# Altium PCB DragonFly.PcbDoc (part 2 of 2)
Units mil, origin at the board's own origin, x right, y up, seen from the top; angles counter-clockwise.
Board outline 3771.33 x 3716.36 mil, 4 copper layers (Top Layer, Signal Layer 1, Signal Layer 2, Bottom Layer), stack 47.519 mil thick; 111 components, 70 nets, 378 pads, 144 vias.
Unrouted connection lines stored in the file: 86.
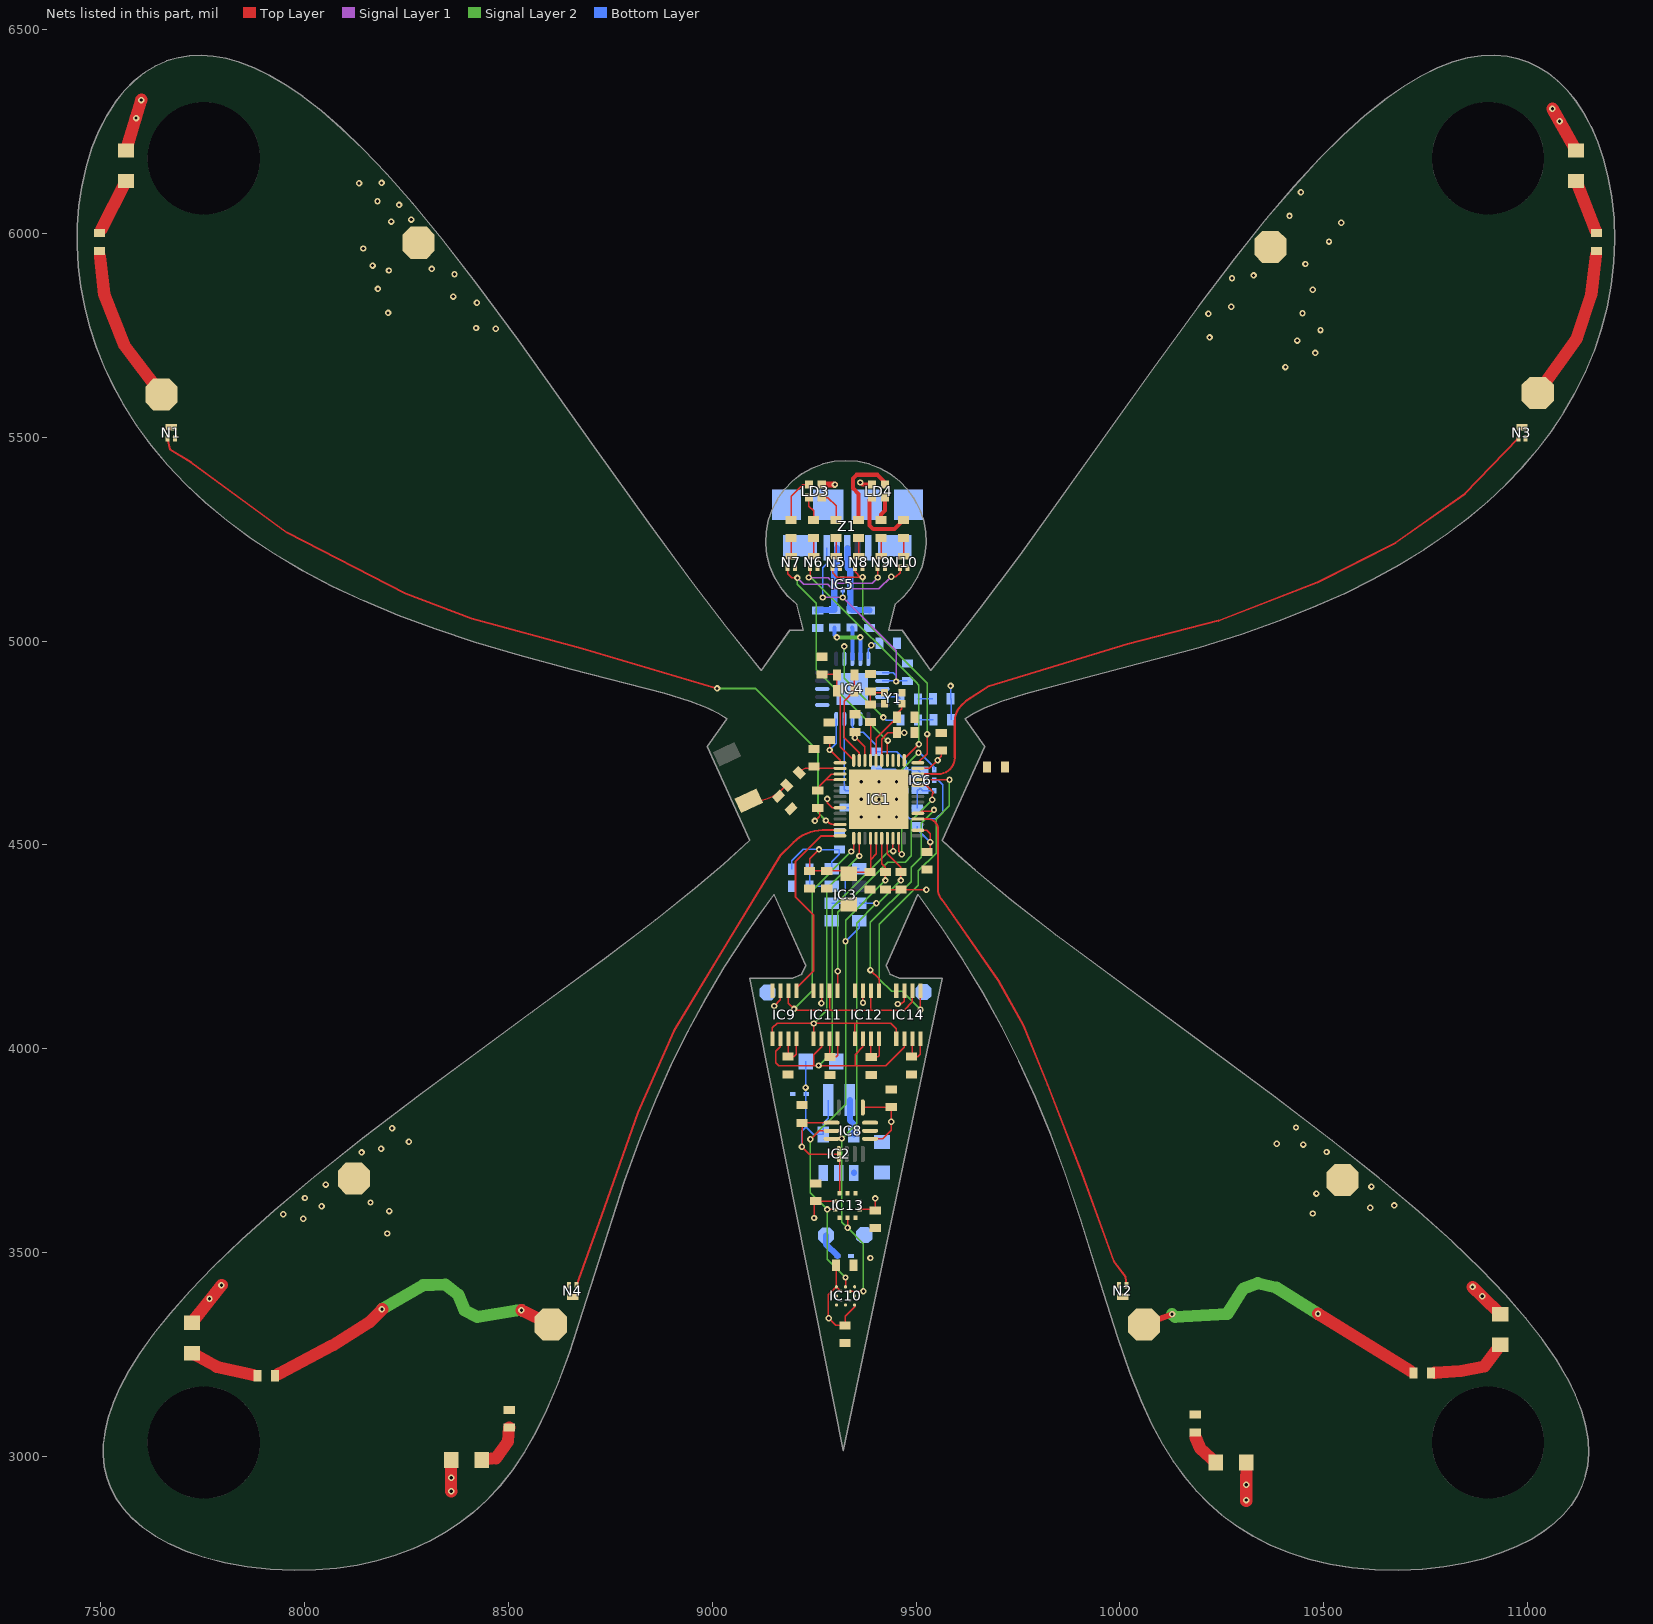
[diagram p4: the nets of this part, all layers, seen from the top]

## Footprints (in the part's own frame and the unit in brackets; to place one, negate y for a bottom-side part, rotate by r counter-clockwise, add the part's x,y. Pads: shape width x height; smd on the part's side, far side on the other; paste and mask are expansions set on the pad) (continued)
"ESP32 QFN35P500X500X90_HS-49N" [mm] "QFN, 48-Leads, Body 5,00x5,00mm, Pitch 0,35mm, Thermal Pad 3,70x3,70mm, IPC Medium Density"
  oval 0.8x0.2 smd: 1(-2.425,2.275) 2(-2.425,1.925) 3(-2.425,1.575) 4(-2.425,1.225) 5(-2.425,0.875) 6(-2.425,0.525) 7(-2.425,0.175) 8(-2.425,-0.175) 9(-2.425,-0.525) 10(-2.425,-0.875) 11(-2.425,-1.225) 12(-2.425,-1.575) 13(-2.425,-1.925) 14(-2.425,-2.275) 25(2.425,-2.275) 26(2.425,-1.925) 27(2.425,-1.575) 28(2.425,-1.225) 29(2.425,-0.875) 30(2.425,-0.525) 31(2.425,-0.175) 32(2.425,0.175) 33(2.425,0.525) 34(2.425,0.875) 35(2.425,1.225) 36(2.425,1.575) 37(2.425,1.925) 38(2.425,2.275)
  oval 0.2x0.8 smd: 15(-1.575,-2.425) 16(-1.225,-2.425) 17(-0.875,-2.425) 18(-0.525,-2.425) 19(-0.175,-2.425) 20(0.175,-2.425) 21(0.525,-2.425) 22(0.875,-2.425) 23(1.225,-2.425) 24(1.575,-2.425) 39(1.575,2.425) 40(1.225,2.425) 41(0.875,2.425) 42(0.525,2.425) 43(0.175,2.425) 44(-0.175,2.425) 45(-0.525,2.425) 46(-0.875,2.425) 47(-1.225,2.425) 48(-1.575,2.425)
  rect 3.7x3.7 smd: 49(0,0)
  silkscreen extent -3.1,2.85 -2.85,3.1, body extent -2.53,-2.53 2.53,2.53, height 0.9
MDMK2020 [mm] "Inductor"
  rect 0.65x2 smd: 1(-0.675,0) 2(0.675,0)
  silkscreen extent -1.09,-1.09 1.09,1.09, body extent -1,-1 1,1, height 1.2
QFN20-127P600-8N [mm]
  oval 0.9x0.25 smd: 1(-1.875,1) 2(-1.875,0.5) 3(-1.875,0) 4(-1.875,-0.5) 5(-1.875,-1) 11(1.875,-1) 12(1.875,-0.5) 13(1.875,0) 14(1.875,0.5) 15(1.875,1)
  oval 0.25x0.9 smd: 6(-1,-1.875) 7(-0.5,-1.875) 8(0,-1.875) 9(0.5,-1.875) 10(1,-1.875) 16(1,1.875) 17(0.5,1.875) 18(0,1.875) 19(-0.5,1.875) 20(-1,1.875)
  rect 1.98x1.98 smd paste-0.5: 21(0,0)
  silkscreen extent -2.92,-2.15 2.15,2.15, body extent -2,-2.01 2.01,2, height 0.8
Signal_point_1mm [mm]
  oct 1x1 smd paste-1: 0(0,0)
Signal_point_2mm [mm]
  oct 2x2 smd paste-1: 0(0,0)
"SOD 923" [mm]
  rect 0.36x0.25 smd mask+0.05: 1(-0.42,0) 2(0.42,0)
  silkscreen extent -0.4,-0.3 0.4,0.3, body extent -0.43,-0.33 0.43,0.33, height 0.39
SOT886 [mm]
  rect 0.325x0.27 smd mask+0.05: 1(-0.337,0.5) 2(-0.337,0) 3(-0.337,-0.5) 4(0.337,-0.5) 5(0.337,-0.025) 6(0.337,0.5)
  silkscreen extent -0.92,-0.85 0.63,0.9, body extent -0.63,-0.85 0.63,0.85, height 0.5
"SOT 23 - 5" [mm]
  rect 0.6x1 smd: 1(0.95,1.15) 2(0,1.15) 3(-0.95,1.15)
  rect 0.7x1 smd: 4(-0.95,-1.25) 5(0.95,-1.25)
  silkscreen extent -1.7,-0.5 1.7,0.4, body extent -1.5,-1.65 1.5,1.55, height 0.92
"USB - microB" [mm]
  rect 0.4x1.6 smd: 1(-1.3,2.675) 2(-0.65,2.675) 3(0,2.675) 4(0.65,2.675) 5(1.3,2.675)
  rect 1.8x1.9 smd: 5(-3.8,0) 5(3.8,0)
  rect 2.1x1.35 smd: 5(-2.95,2.55) 5(2.95,2.55)
  rect 1.9x1.9 smd: 5(-1.2,0) 5(1.2,0)
  silkscreen extent -3.73,-2.64 3.78,1.7, body extent -3.99,-2.69 3.99,2.73, height 2.93
VCNL4040M3OE [mm]
  rect 0.9x0.725 smd mask+0.05: 1(0.85,-1.613) 2(0.85,-0.537) 3(0.85,0.537) 4(0.85,1.613) 5(-0.85,1.613) 6(-0.85,0.537) 7(-0.85,-0.537) 8(-0.85,-1.613)
  silkscreen extent -1.4,-2.5 1.4,2.1, body extent -1.2,-1.9 1.2,1.9, height 3.65
"XTAL 1.6X1.2MM 4-SMD" [mm]
  rect 0.45x0.45 smd: 1(-0.54,0.34) 2(0.54,-0.34) 3(0.54,0.34) 4(-0.54,-0.34)
  body extent -0.8,-0.6 0.8,0.6, height 0.35

## Part data
ANT1: "2.4GHz Chip RF Antenna 2.4GHz"
IC9 IC11 IC12 IC14: library part W25X20CL, DigiKey Part #=W25Q80DVUXIECT-ND
LD1: Color=RX
LD2: Color=TX
LD3 LD4: library part "RGB LED", DigiKey Part #=475-3597-1-ND
LD5 LD6: Color=Red
LD7 LD8 LD9 LD10: Color=Green
Z1: library part "USB - microB", "609-4613-1-ND", DigiKey Part #=609-4613-1-ND
D1: DigiKey Part #=ESD9X5.0ST5GOSCT-ND
IC1: DigiKey Part #=1904-1005-1-ND
IC2: DigiKey Part #=LM3671MF-3.3/NOPBCT-ND
IC3: DigiKey Part #=VCNL4040M3OECT-ND
IC4: DigiKey Part #=768-1128-1-ND
IC5: DigiKey Part #=1727-4161-6-ND
IC6: DigiKey Part #=1727-1075-1-ND
IC8: DigiKey Part #=828-1057-1-ND
IC10: DigiKey Part #=828-1044-1-ND
IC13: DigiKey Part #=828-1079-1-ND
Y1: DigiKey Part #=535-13987-1-ND

## Free pads (board coordinates)
  round 275.59 hole 275.59: 1(7753.32,3034.41) 1(7753.32,6184.02) 1(10902.92,3034.41) 1(10902.92,6184.02)

## Via types
v1: diameter 15.75, hole 7.87, Top Layer to Bottom Layer, tented both sides, 135 vias
v2: diameter 15.75, hole 7.87, Top Layer to Bottom Layer, tented bottom, 9 vias

## Nets (pads, with @x,y where several pads share a name; then routed paths per layer and width w, separated by ;. In a path a pad name is that pad's centre, name@x,y a point inside that pad or via, vN(x,y) a via of type N, cw(c..) or ccw(c..) an arc to the next point about the centre after c; other vN are vias at no path point)
CAP1: C12.2 C13.2 IC1.48 R3.2 | length 263.5
  Top Layer w3.5: C13.2@9269.35,4918.35 9304.35,4918.35 C12.2@9305.69,4917 R3.2@9305.69,4878 9314,4869.69 9314,4740.46 IC1.48@9346.99,4707.47
CAP2: C12.1 IC1.47 R3.1 | length 235.1
  Top Layer w3.5: C12.1@9349,4917 R3.1@9349,4878 9324,4853 9324,4763 9360.77,4726.23 IC1.47@9360.77,4707.47
CHIP_PU: IC1.9 IC6.6 R23.2 | length 134.8
  Top Layer w3.5: v1@9282,4612 9282,4604 9294.67,4591.33 IC1.9@9313.53,4591.33
  Bottom Layer w3.5: R23.2@9503,4589.65 9503,4632.71 IC6.6@9510,4639.71 9516.3,4633.41 IC6.6@9544.45,4633.41
  other v1: 9282,4613
D_N: C26.2 IC5.1 IC5.6 R7.1 Z1.2 | length 197.3
  Bottom Layer w15: C26.2@9259,5075.65 9259.5,5076.15 R7.1@9300.33,5076.15 9299.32,5077.17 IC5.6@9299.32,5125.71 IC5.1@9299.32,5152.29 9299.32,5174.31 9306.17,5181.17 Z1.2@9306.17,5228.69
D_P: C27.2 IC5.3 IC5.4 R8.1 Z1.3 | length 200.7
  Bottom Layer w15: Z1.3@9331.76,5228.69 9331.76,5180.24 9338.68,5173.31 IC5.3@9338.68,5152.29 IC5.4@9338.68,5125.71 9338.68,5115.01 9338.87,5114.82 9338.87,5099.18 9338.68,5098.99 9338.68,5080.14 R8.1@9342.67,5076.15 9385.5,5076.15 C27.2@9386,5075.65
DTR: IC4.18 IC6.3 R24.1 | length 253.2
  Bottom Layer w3.5: IC4.18@9343.63,4809 9343.63,4789.37 9357,4776 9371,4776 9403,4744 R24.1@9403,4728.65 9452.35,4728.65 9475.55,4705.45 IC6.3@9475.55,4684.59 9503.7,4684.59 IC6.3@9510,4678.29
GND: C1.1 C2.1 C3.1 C4.1 C5.1 C6.1 C7.1 C8.1 C9.1 C10.1 C11.1 C13.1 C14.1 C15.1 C17.1 C18.1 C19.1 C20.1 C24.1 C25.1 C26.1 C27.1 C28.1 C29.1 C30.1 C31.1 C32.1 C33.1 C34.1 C35.1 C36.1 C37.1 D1.1 D2.1 IC1.49 IC2.2 IC3.1 IC4.3 IC4.13 IC4.21 IC5.2 IC8.6 IC8.7 IC9.4 IC10.A5 IC10.C1 IC10.C5 IC10.E1 IC10.E3 IC11.4 IC12.4 IC13.3 IC13.5 IC13.8 IC13.9 IC14.4 N1.1 N2.1 N3.1 N4.1 N5.1 N6.1 N7.1 N8.1 N9.1 N10.1 R17.1 R18.1 SP1.0@9136,4138 SP2.0@9518,4139 SP16.0 Y1.3 Y1.4 Z1.5 | length 61.8
  Bottom Layer w15: SP16.0@9279,3542 9279,3520.46 D2.1@9307.46,3492
  other v2: 9365.69,4568.69 9409,4568.69 9452.31,4568.69 9365.69,4612 9409,4612 9452.31,4612 9365.69,4655.31 9409,4655.31 9452.31,4655.31
GPIO0: IC1.23 IC6.4 | length 368.9
  Top Layer w3.5: IC1.23@9457.23,4516.53 9457.23,4484.77 v1(9465,4477)
  Signal Layer 2 w3.5: v1(9465,4477) 9465,4562.83 9465.43,4563.26 9465.43,4574.13 9465,4574.56 9465,4606.13 9465.43,4606.56 9465.43,4617.44 9465,4617.87 9465,4649.44 9465.43,4649.87 9465.43,4660.74 9465,4661.17 9465,4685 v1(9506,4726)
  Bottom Layer w3.5: v1(9506,4726) 9509,4726 9544.45,4690.55 IC6.4@9544.45,4684.59
LD1_B: IC1.42 N7.2 N10.2 | length 879
  Top Layer w3.5: N7.2@9185.24,5180.22 9185.24,5165 9195.24,5155 v1(9209,5155) ; IC1.42@9429.67,4707.47 9429.67,4754.67 v1(9431,4756) ; v1(9439,5158) 9450.83,5158 9460.83,5168 N10.2@9460.83,5180.22
  Signal Layer 1 w3.5: v1(9209,5155) 9224.88,5139.12 9283.88,5139.12 9295,5128 9409,5128 v1(9439,5158)
  Signal Layer 2 w3.5: v1(9209,5155) 9209,5139 9255,5093 9255,4930 9431,4754 v1(9431,4756)
LD1_G: IC1.39 N6.2 N9.2 | length 812
  Top Layer w3.5: v1(9237,5156) 9239.72,5156 9240.36,5155.36 N6.2@9240.36,5180.22 ; N9.2@9405.71,5180.22 9405.71,5156.29 v1(9406,5156) ; IC1.39@9471.01,4707.47 9471.01,4711.01 v1(9507,4747)
  Signal Layer 1 w3.5: v1(9237,5156) 9285,5156 9299,5142 9392,5142 v1(9406,5156)
  Signal Layer 2 w3.5: v1(9237,5156) 9242.56,5156 9283.56,5115 9500,4898.56 9507,4891.56 v1(9507,4747)
LD1_R: IC1.38 N5.2 N8.2 | length 649.3
  Top Layer w3.5: N5.2@9295.48,5180.22 9295.48,5167.52 9306,5157 v1@9363.44,5157 ; N8.2@9350.59,5180.22 9350.59,5169.85 v1@9363.44,5157 ; v1(9369,5157) v1@9363.44,5157 ; IC1.38@9504.47,4701.57 9527,4724.09 v1(9527,4772)
  Signal Layer 2 w3.5: v1(9369,5157) 9369,5055 9527,4897 v1(9527,4772)
LNA_IN: C14.2 IC1.2 L2.1 | length 95.4
  Top Layer w3.5: L2.1@9219.31,4683.31 cw(c9230.12,4672.51) 9230.12,4687.79 IC1.2@9313.53,4687.79
MISO: IC1.15 IC9.2 IC11.2 IC12.2 IC14.2 | length 954.8
  Top Layer w3.5: IC9.2@9186.84,4142.86 9186.84,4112.16 v1(9201,4098) 9201,4095 9288,4095 ; IC11.2@9288.18,4142.86 9288.18,4095.18 9288,4095 ; v1(9341,4484) 9346.99,4489.99 IC1.15@9346.99,4516.53 ; IC12.2@9389.51,4142.86 9389.51,4095.49 9390,4095 ; IC14.2@9490.84,4142.86 9490.84,4114.84 9471,4095 9390,4095 ; 9288,4095 9390,4095
  Signal Layer 2 w3.5: v1(9201,4098) 9245,4142 9245,4388 v1(9341,4484)
MOSI: IC1.16 IC9.5 IC11.5 IC12.5 IC14.5 | length 942
  Top Layer w3.5: IC9.5@9147.47,4025.14 9147.47,4051.47 9159,4063 v1@9249,4063 ; IC11.5@9248.81,4025.14 9248.81,4062.81 v1@9249,4063 ; IC12.5@9350.14,4025.14 9350.14,4062.86 9350,4063 ; IC1.16@9360.77,4516.53 9360.77,4473.23 v1(9361,4473) ; IC14.5@9451.47,4025.14 9451.47,4049.53 9438,4063 9350,4063 ; v1@9249,4063 9350,4063
  Signal Layer 2 w3.5: v1(9249,4062) 9281.12,4094.12 9281.12,4125 9281,4125.12 9281,4393 v1(9361,4473)
MOTOR1: IC1.12 N1.2 | length 2033.3
  Top Layer w5: N1.2@7664.14,5497.22 7670,5470 7721,5439 7957,5266 8248,5117 8410,5055 8681,4982 v1(9012,4884) ; v1(9279,4560) ccw(c9303.16,4584.16) 9286.88,4554.12 ccw(c9303.16,4584.16) 9303.16,4549.99 IC1.12@9313.53,4549.99
  Signal Layer 2 w5: v1(9012,4884) 9106,4884 9259,4731 9259,4580 v1(9279,4560)
MOTOR2: IC1.36 N3.2 | length 1786.6
  Top Layer w5: IC1.36@9504.47,4674.01 9555.01,4674.01 ccw(c9555.01,4714) 9595,4714 9595,4805 cw(c9645.7,4805) 9609.83,4840.83 9622,4853 9679,4890 9679.92,4890.28 10019,4993 10242,5050 10484,5144 10676,5241 10846,5361 N3.2@10977.14,5497.22
MOTOR3: IC1.28 N2.2 | length 1295.7
  Top Layer w5: IC1.28@9504.47,4563.77 9529.23,4563.77 cw(c9529.23,4539.16) 9553.84,4539.16 9553.84,4392.58 ccw(c9597.08,4392.58) 9557.76,4374.59 ccw(c9597.08,4392.58) 9566.51,4362 9702,4167 9764,4057 9823,3911 9907,3694 9985,3479 10014,3441 N2.2@10015.86,3419.78
MOTOR4: IC1.13 N4.2 | length 1339.8
  Top Layer w5: N4.2@8666.86,3419.78 8728,3590 8818,3844 8906,4044 9039,4263 9167.52,4474.52 9199.92,4506.92 cw(c9270.63,4436.21) 9270.63,4536.21 IC1.13@9313.53,4536.21
NetANT1_1: ANT1.1 C15.2 L2.2 | length 113.2
  Top Layer w3.5: ANT1.1@9089.61,4608.26 9102.84,4608.26 ccw(c9102.84,4708.26) 9173.55,4637.55 L2.2@9182.69,4646.69 L2.2@9188.69,4652.69
NetC7_2: C7.2 IC3.3 R5.1 | length 96.5
  Bottom Layer w3.5: R5.1@9239.01,4440.52 C7.2@9239.01,4398.52 9292.71,4398.52 IC3.3@9293.31,4399.11
NetC18_2: C18.2 R6.2 Y1.2 | length 67.7
  Top Layer w3.5: R6.2@9388,4844.65 C18.2@9388,4876.35 9390.96,4873.39 Y1.2@9422.74,4873.39
NetIC1_40: IC1.40 R4.2
NetIC2_5: IC2.5 L3.1 | length 87.9
  Bottom Layer w15: L3.1@9337.57,3874 9337.57,3824.43 9347.4,3814.6 IC2.5@9347.4,3790.21
NetIC3_2: IC3.2 IC3.5 | length 138.9
  Bottom Layer w3.5: IC3.2@9293.31,4356.79 9317.42,4356.79 9326.77,4366.14 9326.77,4429.13 9339.07,4441.44 IC3.5@9360.24,4441.44
NetIC4_7: IC4.7 R10.1 | length 288.5
  Signal Layer 2 w3.5: v1(9324,4987) 9324,4909 v1(9420,4813)
  Bottom Layer w3.5: IC4.7@9323.94,4956.64 9324,4956.69 v1(9324,4987) ; v1(9420,4813) 9426.6,4806.4 R10.1@9461.6,4806.4
NetIC4_8: IC4.8 R8.2 | length 76.8
  Bottom Layer w10: R8.2@9342.67,5032.85 9344,5031.51 IC4.8@9344,4956.64
NetIC4_9: IC4.9 R7.2 | length 135.8
  Signal Layer 2 w10: v1(9306,5009) v1(9363,5009)
  Bottom Layer w10: R7.2@9300.33,5032.85 9300.33,5014.67 v1(9306,5009) ; v1(9363,5009) 9363.68,5008.31 IC4.9@9363.68,4956.64
NetIC4_14: IC4.14 R9.1 | length 46
  Bottom Layer w3.5: IC4.14@9417.45,4863.13 9456.59,4863.13 R9.1@9461.44,4858.28
NetIC6_2: IC6.2 R24.2 | length 83.5
  Bottom Layer w3.5: R24.2@9403,4685.35 9449.2,4685.35 IC6.2@9475.55,4659
NetIC6_5: IC6.5 R25.2 | length 350.2
  Bottom Layer w3.5: R25.2@9326,4591.35 9456.65,4591.35 9484.12,4563.88 9548.88,4563.88 9565,4580 9565,4648 9554,4659 IC6.5@9544.45,4659
NetLD1_2: LD1.2 R9.2 | length 37
  Bottom Layer w3.5: R9.2@9504.75,4858.28 9541.06,4858.28 LD1.2@9541.57,4858.79
NetLD2_2: LD2.2 R10.2 | length 37.9
  Bottom Layer w3.5: R10.2@9504.91,4806.4 9505.41,4806.91 LD2.2@9542.57,4806.91
NetLD3_2: LD3.2 R11.2 | length 79
  Top Layer w3.5: LD3.2@9268.75,5352.25 9283.75,5352.25 9303.83,5332.17 R11.2@9303.83,5296.56
NetLD3_3: LD3.3 R12.2 | length 60.4
  Top Layer w3.5: LD3.3@9237.25,5352.25 9237.25,5330.75 9248.72,5319.28 R12.2@9248.72,5296.56
NetLD3_4: LD3.4 R13.2 | length 114.4
  Top Layer w3.5: R13.2@9193.6,5296.56 9193.6,5355.6 9221.75,5383.75 LD3.4@9237.25,5383.75
NetLD4_2: LD4.2 R14.2 | length 204
  Top Layer w10: R14.2@9358.95,5296.56 9358.95,5361.05 9345,5375 9345,5399 9354,5408 9405,5408 9423.75,5389.25 LD4.2@9423.75,5383.75
NetLD4_3: LD4.3 R15.2 | length 59.7
  Top Layer w10: R15.2@9414.07,5296.56 9414.07,5311.07 9423.75,5320.75 LD4.3@9423.75,5352.25
NetLD4_4: LD4.4 R16.2 | length 166.7
  Top Layer w10: LD4.4@9392.25,5352.25 9386,5346 9386,5284 9395,5275 9447.63,5275 R16.2@9469.19,5296.56
NetLD5_2: LD5.2 R17.2 | length 120.5
  Top Layer w30: LD5.2@8434.4,2992 8470,2996 8499,3037 R17.2@8502,3071.35
NetLD6_2: LD6.2 R18.2 | length 80.3
  Top Layer w30: 10186,3046 10197,3020 LD6.2@10235.6,2985
NetLD7_2: LD7.2 R19.2 | length 134.7
  Top Layer w30: R19.2@7500.99,6008.51 LD7.2@7562,6128.6
NetLD8_2: LD8.2 R20.2 | length 128.3
  Top Layer w30: LD8.2@11119,6128.6 R20.2@11165.7,6009.1
NetLD9_2: LD9.2 R21.2 | length 189.5
  Top Layer w30: R21.2@10772.03,3205.57 10837,3210 10894,3221 LD9.2@10933,3274.6
NetLD10_2: LD10.2 R22.2 | length 161.3
  Top Layer w30: LD10.2@7724,3253.6 7785,3220 7874.48,3200.18
NetN5_3: N5.3 R11.1 | length 45.7
  Top Layer w3.5: R11.1@9303.83,5253.25 9303.83,5208.28 N5.3@9304.34,5207.78
NetN6_3: N6.3 R12.1 | length 45.7
  Top Layer w3.5: R12.1@9248.72,5253.25 9248.72,5208.28 N6.3@9249.22,5207.78
NetN7_3: N7.3 R13.1 | length 45.7
  Top Layer w3.5: R13.1@9193.6,5253.25 9193.6,5208.28 N7.3@9194.1,5207.78
NetN8_3: N8.3 R14.1 | length 45.7
  Top Layer w3.5: R14.1@9358.95,5253.25 9359.46,5252.75 N8.3@9359.46,5207.78
NetN9_3: N9.3 R15.1 | length 45.7
  Top Layer w3.5: R15.1@9414.07,5253.25 9414.07,5208.28 N9.3@9414.58,5207.78
NetN10_3: N10.3 R16.1 | length 45.7
  Top Layer w3.5: R16.1@9469.19,5253.25 9469.69,5252.75 N10.3@9469.69,5207.78
RTS: IC4.19 IC6.1 R25.1 | length 325.3
  Bottom Layer w3.5: IC4.19@9323.94,4809 9323.94,4636.71 R25.1@9326,4634.65 9327.24,4633.41 IC6.1@9475.55,4633.41
SCL: IC1.20 IC3.8 IC8.13 IC10.A3 IC13.2 R2.1 | length 1362
  Top Layer w3.5: v1(9241,3778) 9241,3777 9263,3799 IC8.13@9292.76,3799 ; v1(9282,3606) 9282.16,3606.16 IC13.2@9301.98,3606.16 ; IC10.A3@9327,3416.28 v1(9327,3439) ; IC1.20@9415.89,4516.53 9415.89,4454.11 9425,4445 R2.1@9425,4433.65 v1(9425,4413)
  Signal Layer 2 w3.5: v1(9327,3439) 9282,3484 v1(9282,3606) 9241,3647 v1(9241,3778) 9327,3864 v1(9327,4264) 9327,4315 v1(9425,4413)
  Bottom Layer w3.5: v1(9327,4264) 9360.24,4297.24 IC3.8@9360.24,4314.47
SCLK: IC1.22 IC9.6 IC11.6 IC12.6 IC14.6 | length 1209.7
  Top Layer w3.5: IC9.6@9167.16,4025.14 9167.16,4005.16 9156,3994 9156,3966 9163,3959 9249,3959 ; IC11.6@9268.49,4025.14 9268.49,4004.49 9249,3985 9249,3959 ; IC12.6@9369.82,4025.14 9369.82,4004.82 9351,3986 9351,3959 ; IC1.22@9443.45,4516.53 9443.45,4485.55 v1(9444,4485) ; IC14.6@9471.16,4025.14 9471.16,4004.16 9426,3959 9351,3959 ; 9249,3959 v1(9261,3959) 9351,3959
  Signal Layer 2 w3.5: v1(9261,3959) 9294,3992 9294,4346 9433,4485 v1(9444,4485)
SDA: IC1.21 IC3.7 IC8.14 IC10.B4 IC13.4 R1.1 | length 1335.4
  Top Layer w3.5: IC8.14@9292.76,3779.32 9317.32,3779.32 v1(9318,3780) ; v1(9332,3561) IC13.4@9332,3585.98 ; IC10.B4@9338.14,3405.14 9370.86,3405.14 v1(9371,3405.28) ; IC1.21@9429.67,4516.53 9429.67,4478.33 9463,4445 R1.1@9463,4433.65 v1(9463,4413)
  Signal Layer 2 w3.5: v1(9371,3405.28) 9371,3522 v1(9332,3561) 9318,3575 v1(9318,3780) 9354,3816 9354,4308 v1(9402.79,4356.79) 9406.79,4356.79 v1(9463,4413)
  Bottom Layer w3.5: IC3.7@9360.24,4356.79 v1(9402.79,4356.79)
U0RXD: IC4.17 R4.1
U0TXD: IC1.41 IC4.1
VBAT: C19.2 D2.2 IC2.1 IC2.3 LD3.1 LD4.1 LD5.1 LD6.1 LD7.1 LD8.1 LD9.1 LD10.1 SP1.0@8280,5977 SP2.0@10546,3678 SP5.0 SP6.0 SP15.0 | length 697.4
  Top Layer w10: v1(9363,5389) 9368.25,5383.75 LD4.1@9392.25,5383.75
  Top Layer w15: LD3.1@9268.75,5383.75 9300.75,5383.75 v1(9301,5384)
  Top Layer w30: LD7.1@7562,6203.4 7586.34,6283.2 v1(7599.69,6327) v1@7600,6328 ; LD10.1@7724,3328.4 7768.97,3385.45 v1(7796.21,3420) v1@7797,3421 ; LD5.1@8359.6,2992 8359.6,2915.4 v1(8360,2915) ; v1@10310,2891 v1(10310,2893) v1(10310.17,2931) LD6.1@10310.4,2985 ; v1(10865,3416) 10888.75,3392.74 LD9.1@10933,3349.4 ; v1(11061,6306) v1(11078.52,6275) LD8.1@11119,6203.4
  Bottom Layer w15: IC2.1@9347.4,3695.72 IC2.1@9348.28,3696.6
  other v1: 8360,2948 7767,3387 10889,3393 9388,3487 8203,3547 7997,3583 7948,3594 10473,3596 8208,3602 10614,3610 8042,3614 10673,3616 8162,3623 8001,3634 10482,3645 10617,3662 8052,3667 8140,3746 10507,3747 8188,3755 10450,3765 10385,3767 8256,3772 8215,3805 10432,3807 10406,5672 10479,5707 10435,5737 10220,5745 10492,5763 8469,5766 8421,5768 10217,5803 10448,5804 8205,5805 10273,5820 8423,5830 8365,5845 10473,5862 8180,5864 10275,5890 10328,5897 8368,5900 8207,5909 8312,5913 8167,5921 10455,5925 8144,5963 10513,5980 10543,6026 8213,6029 8262,6034 10416,6043 8232,6070 8179,6079 10444,6101 8134,6123 8189,6124 7587,6283
VBUS: C25.2 IC4.11 IC4.12 IC5.5 Z1.1 | length 566.9
  Signal Layer 1 w3.5: v1(9271,5107) v1(9320,5107) 9451,4976 v1(9451,4901)
  Bottom Layer w3.5: v1(9271,5107) 9271,5180 9280.57,5189.57 Z1.1@9280.57,5228.69 ; v1(9320,5107) IC5.5@9320,5125.71 ; IC4.12@9417.45,4902.5 9449.5,4902.5 v1(9451,4901) ; IC4.11@9417.45,4922.19 9443.81,4922.19 9451,4915 v1(9451,4901) ; C25.2@9479,4902.35 9452.35,4902.35 v1(9451,4901)
VDD3P3: IC1.3 IC1.4 L1.2 | length 99.3
  Top Layer w3.5: 9262,4644 9278.23,4660.23 ; IC1.4@9313.53,4660.23 9278.23,4660.23 ; IC1.3@9313.53,4674.01 9292.01,4674.01 9278.23,4660.23
VDD3P3_CPU: C1.2 C2.2 C3.2 C4.2 C5.2 C6.2 C8.2 C9.2 C10.2 C11.2 C20.2 C24.2 C28.2 C29.2 C30.2 C31.2 C32.2 C33.2 C34.2 C35.2 C36.2 C37.2 D1.2 IC1.1 IC1.18 IC1.19 IC1.26 IC1.37 IC1.43 IC1.46 IC2.4 IC3.4 IC4.10 IC4.20 IC8.1 IC8.5 IC8.8 IC8.12 IC9.3 IC9.7 IC9.8 IC10.A1 IC10.B2 IC10.E5 IC11.3 IC11.7 IC11.8 IC12.3 IC12.7 IC12.8 IC13.1 IC13.6 IC13.10 IC14.3 IC14.7 IC14.8 L1.1 L3.2 LD1.1 LD2.1 R1.2 R2.2 R5.2 R23.1 | length 3287.8
  Top Layer w3.5: v1(9152,4105) 9167.07,4120.07 9167.07,4125 IC9.3@9167.16,4142.86 ; IC9.7@9186.84,4025.14 9186.84,3981.5 C30.2@9186,3980.65 9200.65,3980.65 9206.53,3986.53 IC9.8@9206.53,4025.14 ; C29.2@9219,3816.65 C29.2@9221.03,3818.68 ; C29.2@9219,3818.68 C29.2@9221.03,3818.68 ; v1(9220,3760) v1@9221.03,3758.97 ; v1(9250,3585) 9250,3622.35 C35.2@9254,3626.35 9254.5,3625.84 IC13.1@9301.98,3625.84 ; v1(9252,4559) 9264.02,4571.02 L1.1@9264.02,4591.33 ; v1(9262,4489) 9239,4466 C10.2@9239,4436.65 C9.2@9281,4436.65 9327.75,4436.65 C8.2@9335,4429.4 9339.25,4433.65 C3.2@9387,4433.65 9388.33,4434.98 9388.33,4464.33 ; v1@9268.49,4113 IC11.3@9268.49,4142.86 ; C6.2@9287,4757.35 9288,4756.35 v1(9288,4733) 9313.53,4707.47 IC1.1@9313.53,4701.57 ; IC11.7@9288.18,4025.14 9288.18,3980.65 9304.65,3980.65 9307.86,3983.86 IC11.8@9307.86,4025.14 ; IC8.12@9292.76,3818.68 C29.2@9221.03,3818.68 ; C31.2@9303.35,3469 9304.72,3467.63 IC10.A1@9304.72,3416.28 ; IC13.10@9312.32,3646.02 9312.32,3740.07 IC8.1@9310.47,3741.91 9238.09,3741.91 v1@9221.03,3758.97 ; IC10.B2@9315.86,3405.14 IC10.A1@9304.72,3416.28 ; IC10.E5@9349.28,3371.72 9349.28,3367.28 9326,3344 C32.2@9326,3321.65 9303.35,3321.65 v1(9286,3339) 9285,3340 9285,3396.57 IC10.A1@9304.72,3416.28 ; C2.2@9350,4777.35 9350,4766 9374.55,4741.45 IC1.46@9374.55,4707.47 ; IC13.6@9362.02,3606.16 9397.5,3606.16 C36.2@9400,3603.65 v1(9400,3633) ; IC8.8@9369.53,3856.09 C28.2@9439,3856.09 ; v1@9369.82,4113 IC12.3@9369.82,4142.86 ; IC8.5@9387.24,3779.32 9418.32,3779.32 9439,3800 v1(9439,3821) C28.2@9439,3856.09 ; IC1.18@9388.33,4516.53 9388.33,4464.33 ; IC12.7@9389.51,4025.14 9389.51,3980.65 9406.65,3980.65 9409.19,3983.19 IC12.8@9409.19,4025.14 ; IC1.19@9402.11,4516.53 9402.11,4478.11 9388.33,4464.33 ; IC1.43@9415.89,4707.47 9415.89,4759.89 9431,4775 v1(9471,4775) 9450.35,4775 9452.35,4777 C1.2@9453.35,4776 ; R2.2@9425,4390.35 R1.2@9463,4390.35 v1(9525.35,4390.35) ; C28.2@9439,3857.35 C28.2@9439,3856.09 ; v1(9455,4110) 9464.16,4110 9471.16,4117 IC14.3@9471.16,4142.86 ; IC14.7@9490.84,4025.14 9490.84,3982.5 C37.2@9489,3980.65 9504.65,3980.65 9510.53,3986.53 IC14.8@9510.53,4025.14 ; IC1.26@9504.47,4536.21 9525.79,4536.21 9535,4527 v1(9535,4507) C5.2@9535,4484.65 ; IC1.37@9504.47,4687.79 9532.79,4687.79 v1(9553,4708) 9562,4717 C4.2@9562,4731.35 ; v1@9221.03,3758.97 C29.2@9221.03,3818.68
  Bottom Layer w3.5: R5.2@9195.7,4440.52 9195.7,4461.7 9223,4489 v1(9262,4489) 9262.65,4488.35 C11.2@9312,4488.35 9312,4477 9293.31,4458.31 IC3.4@9293.31,4441.44 ; v1(9220,3760) 9220,3797.8 9229.6,3807.4 ; v1(9229,3905) 9229.6,3905.6 C20.2@9229.6,3969 ; v1@9229.6,3905 9229.6,3807.4 ; L3.2@9284.43,3874 9284.43,3829.43 9272.6,3817.6 IC2.4@9272.6,3790.21 9247.35,3790.21 9230.16,3807.4 9229.6,3807.4 ; v1(9288,4733) 9304.26,4749.26 IC4.20@9304.26,4809 ; IC4.10@9383,4956.64 9383,4980 9398,4995 C24.2@9410.35,4995 ; R23.1@9503,4546.35 9503,4539 v1(9535,4507) ; v1(9584.87,4890.13) LD1.1@9584.87,4858.79 9585.87,4857.79 LD2.1@9585.87,4806.91
  other v1: 9268,4112 9370,4113 9350,4763 9390,4990
VMOTOR1: N1.3 R19.1 SP3.0 | length 378.4
  Top Layer w30: 7498.6,5943.07 7509,5850 7558,5726 SP3.0@7649,5605
VMOTOR2: N3.3 R20.1 SP7.0 | length 375.4
  Top Layer w30: SP7.0@11025,5609 11121,5743 11156,5850 11167.78,5947.27
VMOTOR3: N2.3 R21.1 SP4.0 | length 756.8
  Top Layer w15: SP4.0@10059,3324 v1(10128,3349)
  Top Layer w30: v1(10486,3350) R21.1@10712.52,3209.84
  Signal Layer 2 w30: v1(10128,3349) 10135.53,3342.29 10263.28,3349.59 10302,3411 10338,3425 10384,3414 v1(10486,3350)
VMOTOR4: N4.3 R22.1 SP8.0 | length 780.2
  Top Layer w30: R22.1@7936.66,3202.75 8068,3272 8159,3329 8191,3361 v1(8190,3361) ; v1(8532,3359) SP8.0@8604,3324
  Signal Layer 2 w30: v1(8190,3361) 8291,3420 8345,3422 8377,3397 8393,3358 8424,3342 8520,3358 v1(8532,3359)
W25_CS_1: IC1.14 IC9.1 | length 488.2
  Top Layer w5: IC9.1@9206.53,4142.86 9206.53,4148.53 9249,4191 9249,4328 9204,4373 9204,4459 9267.43,4522.43 IC1.14@9313.53,4522.43
W25_CS_2: IC1.34 IC11.1 | length 653.3
  Top Layer w3.5: IC11.1@9307.86,4142.86 9307.86,4189.86 v1(9308,4190) ; IC1.34@9504.47,4646.45 9524.55,4646.45 9543,4628 9540,4625 v1(9540,4611)
  Signal Layer 2 w3.5: v1(9308,4190) 9308,4335 9431,4458 9473,4458 9488,4473 9488,4559 v1(9540,4611)
W25_CS_3: IC1.29 IC12.1 | length 561.7
  Top Layer w3.5: v1(9388,4193) 9409.19,4171.81 IC12.1@9409.19,4142.86 ; IC1.29@9504.47,4577.55 9505.02,4577 9507.02,4579 9509.02,4577 9514.17,4582.14 9540.14,4582.14 v1(9544,4586)
  Signal Layer 2 w3.5: v1(9388,4193) 9388,4310 9488,4410 9488,4445 9513,4470 9513,4553 9544,4584 v1(9544,4586)
W25_CS_4: IC1.35 IC14.1 | length 817
  Top Layer w3.5: IC1.35@9504.47,4660.23 9581.77,4660.23 v1(9582,4660) ; IC14.1@9510.53,4142.86 9510.53,4096.47 v1(9511,4096)
  Signal Layer 2 w3.5: v1(9511,4096) 9466,4141 9440,4141 9410,4171 9410,4305 9506,4401 9506,4437 9549.12,4480.12 9549.12,4563.12 9582,4596 v1(9582,4660)
XTAL_N: C17.2 IC1.44 Y1.1 | length 169
  Top Layer w3.5: IC1.44@9402.11,4707.47 9402.11,4762.11 9446,4806 9452.35,4806 9452.35,4821.35 9465.26,4834.26 Y1.1@9465.26,4846.61
XTAL_P: IC1.45 R6.1 | length 94
  Top Layer w3.5: R6.1@9388,4801.35 9388.33,4801.02 IC1.45@9388.33,4707.47
pads on no net: ANT1.2 IC1.5 IC1.6 IC1.7 IC1.8 IC1.10 IC1.11 IC1.17 IC1.24 IC1.25 IC1.27 IC1.30 IC1.31 IC1.32 IC1.33 IC3.6 IC4.2 IC4.4 IC4.5 IC4.6 IC4.15 IC4.16 IC8.2 IC8.3 IC8.4 IC8.9 IC8.10 IC8.11 IC10.D2 IC10.D4 IC13.7 Z1.4

## Polygon pours and split planes (outlines as drawn)
VBAT on Bottom Layer "VBAT_L04_P012" (solid, shelved, pour order 12): 9490,3724 9165,3724 9136,3695 9136,3153 9322,2967 9510,3155 9510,3698
VBAT on Signal Layer 1 "VBAT_L02_P010" (solid, shelved, pour order 10): 7124,6623 11397,6623 11837,6183 11837,2912 10995,2070 7769,2070 6976,2863
VDD3P3_CPU on Signal Layer 2 "VDD3P3_CPU_L03_P028" (solid, shelved, pour order 28): 7065,6701 11436,6701 11908,6229 11908,2937 11196,2225 7532,2225 6742,3015
VMOTOR3 on Top Layer "VMOTOR3_L01_P000" (solid, shelved, pour order 0): 9992,3401 9992,3385 10018,3305 10078,3364 10019,3401
VMOTOR4 on Top Layer "VMOTOR4_L01_P004" (solid, shelved, pour order 4): 8642.86,3400.76 8572.94,3353.83 8641.86,3304.76 8670.86,3384.76 8670.86,3400.76
VMOTOR2 on Top Layer "VMOTOR2_L01_P006" (solid, shelved, pour order 6): 10986,5628 10972,5532 10972,5516 11000,5516 11064,5588
VMOTOR1 on Top Layer "VMOTOR1_L01_P008" (solid, shelved, pour order 8): 7610,5585 7660,5517 7687,5531 7689,5624
VBAT on Top Layer "VBAT_L01_P020" (solid, shelved, pour order 20): 10477,3890 10295,3702 10578,3486 10773,3688
VBAT on Top Layer "VBAT_L01_P022" (solid, shelved, pour order 22): 7848,3665 8148,3939 8381,3678 8095,3417
VBAT on Top Layer "VBAT_L01_P024" (solid, shelved, pour order 24): 8273,6253 7928,6001 8335,5648 8625,5849
VBAT on Top Layer "VBAT_L01_P026" (solid, shelved, pour order 26): 10304,6233 10639,5988 10466,5596 10039,5804